# Altium PCB Slave_2_button.PcbDoc
Units mil, origin at the board's own origin, x right, y up, seen from the top; angles counter-clockwise.
Board outline 2250 x 2915 mil, 2 copper layers (Top Layer, Bottom Layer); 28 components, 19 nets, 108 pads, 6 vias.
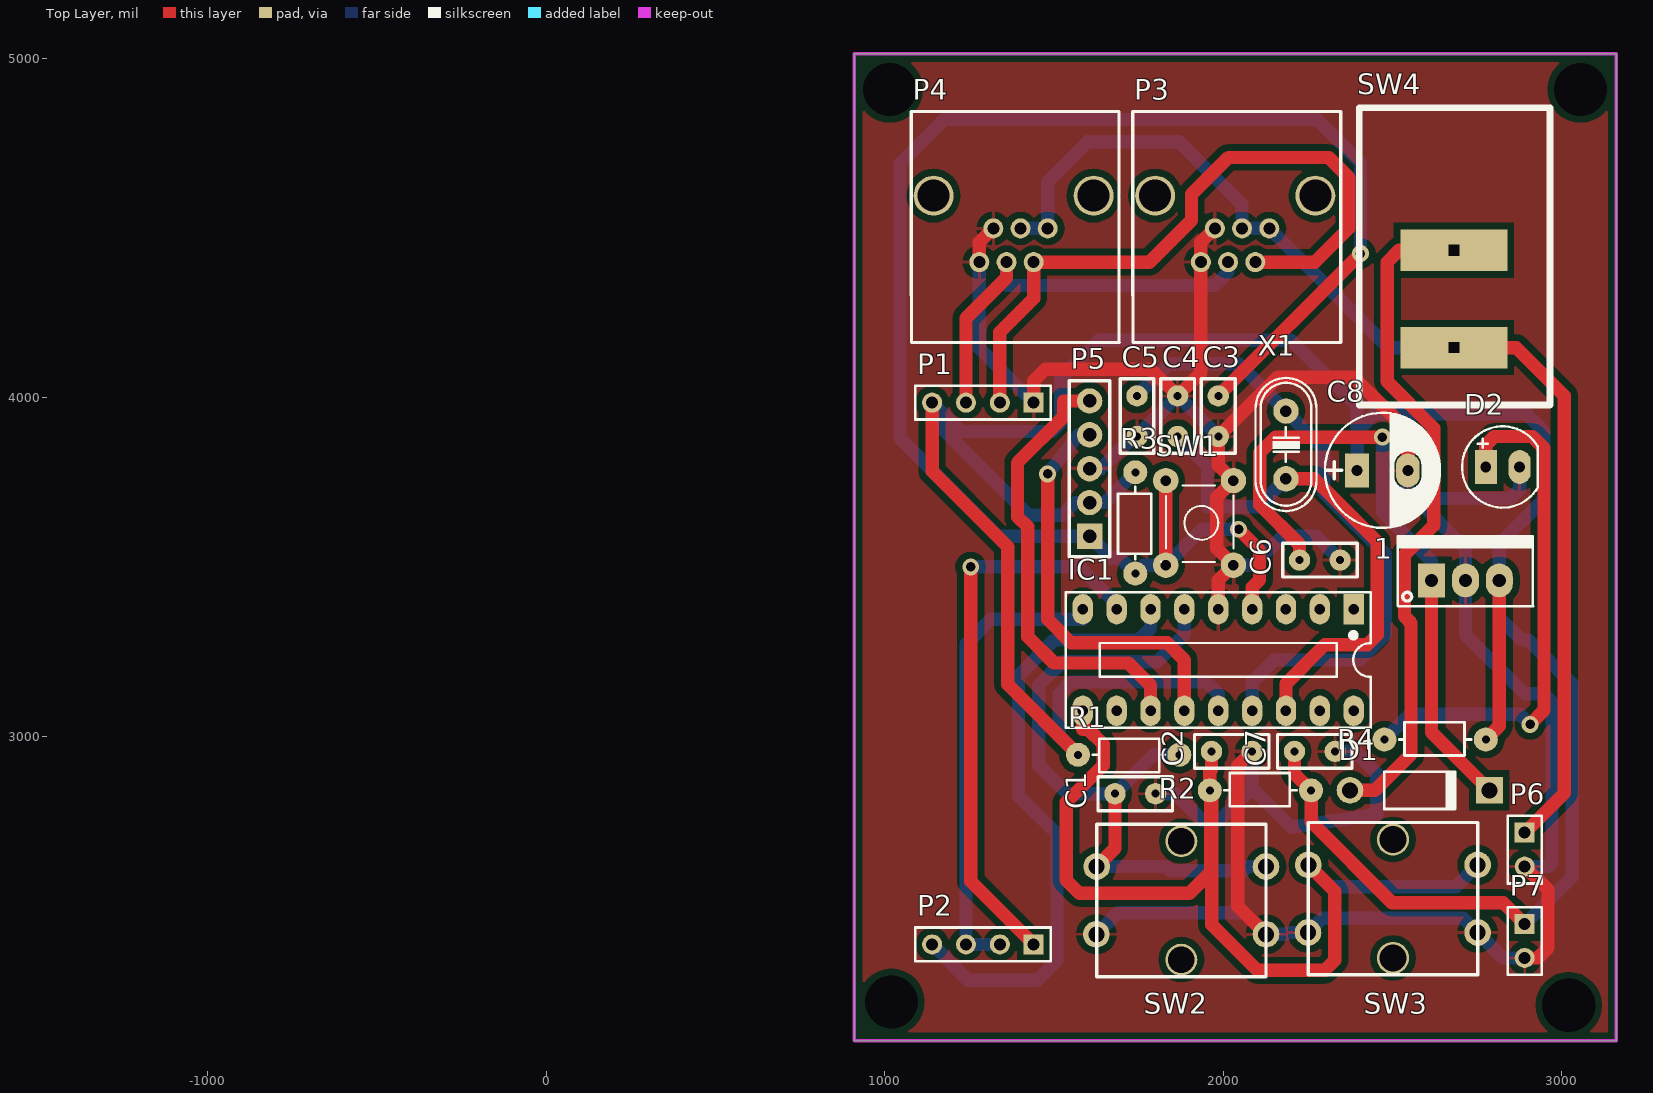
[diagram p0: Top Layer view]
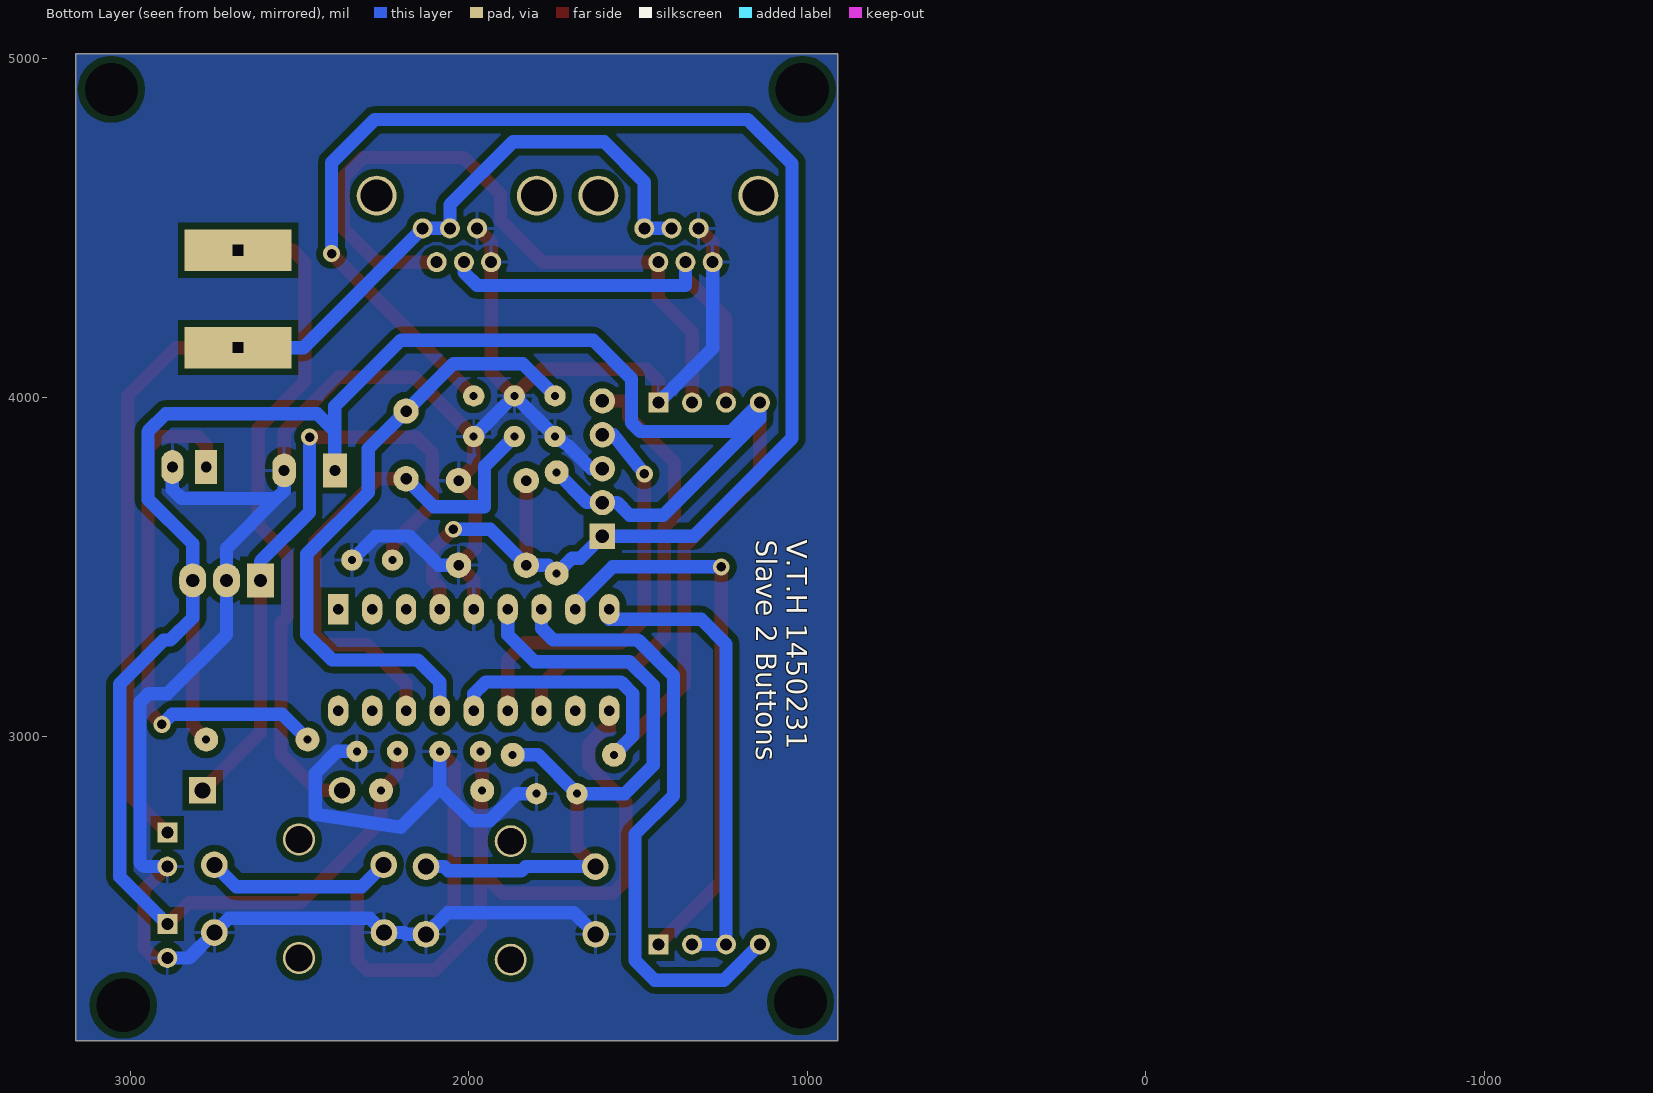
[diagram p1: Bottom Layer view, seen from below]
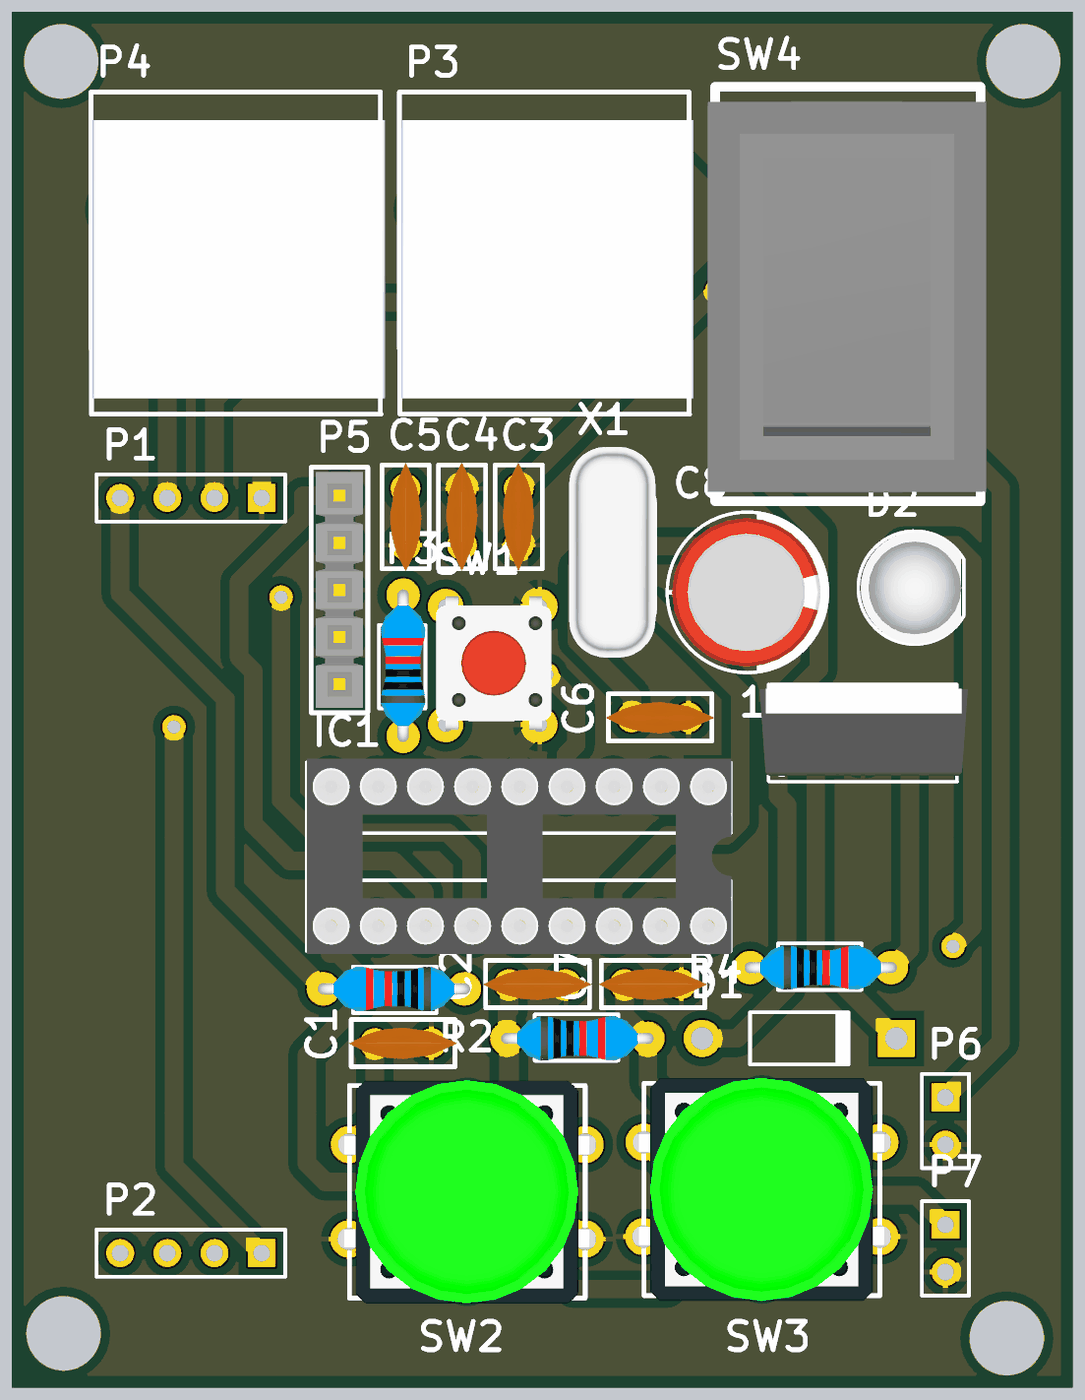
[diagram p2: 3D render of the assembled board from above, using the file's embedded part models]

## Layer stack, top to bottom
Top Solder: solder mask 0.4, Solder Resist, Dk 3.5
Top Layer: signal copper 1.4
Dielectric 1: dielectric 12.6, FR-4, Dk 4.8
Bottom Layer: signal copper 1.4
Bottom Solder: solder mask 0.4, Solder Resist, Dk 3.5

## Board outline
910,2100 3160,2100 3160,5015 910,5015

## Design rules (kind name [scope] priority, off if disabled: settings)
Clearance [All] p1: gap=19.68 ignorepadtopadclearanceinfootprint=FALSE
PolygonConnect [All] p1: connectstyle=Relief reliefconductorwidth=10 reliefentries=4 polygonreliefangle="90 Angle" airgapwidth=19.68
RoutingVias [All] p1: holewidth=28 width=50 viastyle="Through Hole" minholewidth=28 minwidth=50 maxholewidth=28 maxwidth=50
SolderMaskExpansion [All] p1: expansion=4
Width [All] p1: maxlimit=78.74 minlimit=19.68 preferedwidth=39.37
30 further rules are at their usual default settings.

## Components (designator, comment, footprint, x,y, rotation, side; value= is the part's Value field where it differs from the comment)
1 "L78M05CP" QTO-220 2615,3460 r0 top
C1 "Capacitor Ceramic" "Cap Non-Pol 3mm" 1740,2830 r180 top value=100n
C2 "Capacitor Ceramic" "Cap Non-Pol 3mm" 2025,2955 r180 top value=100n
C3 "Capacitor Ceramic" "Cap Non-Pol 3mm" 1985,3945 r90 top value=100n
C4 "Cap Non-pol" "Cap Non-Pol 3mm" 1865,3945 r90 top value=22p
C5 "Cap Non-pol" "Cap Non-Pol 3mm" 1745,3945 r270 top value=22p
C6 "Cap Non-pol" "Cap Non-Pol 3mm" 2285,3520 r180 top value=100n
C7 "Cap Non-pol" "Cap Non-Pol 3mm" 2270,2955 r180 top value=100n
C8 "100uF/16V" CP1.5/3.4 2395,3785 r0 top value=100uF/35V/50V
D1 "Diode 1N4007" DO-41 2580,2840 r0 top
D2 "LED" "LED-5mm RED" 2775,3795 r0 top
IC1 "PIC16F628A" DIP18/W0.3 2385,3375 r180 top
P1 "Header 4" HDR1X4 1440,3985 r180 top
P2 "Header 4" HDR1X4 1440,2385 r180 top
P3 "Header 8" RJ11 2094.29,4400 r180 top
P4 "Header 8" RJ11 1440,4400 r180 top
P5 "Header 5" "Header 5" 1605,3590 r90 top
P6 "Header 2" HDR1X2 2890,2715 r270 top
P7 "Header 2" HDR1X2 2890,2445 r270 top
R1 "RES_SMD_0805" "RESISTOR 1/4W" 1870,2945 r180 top value=10k
R2 "RES_SMD_0805" "RESISTOR 1/4W" 1960,2840 r0 top value=10k
R3 "RES_SMD_0805" "RESISTOR 1/4W" 1740,3480 r90 top value=10k
R4 "RES_SMD_0805" "RESISTOR 1/4W" 2475.79,2990 r0 top value=1k
SW1 "SW7" SW4 2030,3755 r270 top value="Button chip 4 pin"
SW2 "SW-4P-B" SW-4P-B 1875,2515 r180 top
SW3 "SW-4P-B" SW-4P-B 2500,2520 r180 top
SW4 "SW_BapBenh" SW_Bapbenh 2685,4175 r0 top
X1 "20Mhz" XT2 2185,3860 r270 top value=4Mhz

## Footprints (in the part's own frame and the unit in brackets; to place one, negate y for a bottom-side part, rotate by r counter-clockwise, add the part's x,y. Pads: shape width x height; smd on the part's side, far side on the other; paste and mask are expansions set on the pad)
"Cap Non-Pol 3mm" [mm] "Capacitor, Radial; Body 5.6 x 2.5 mm (L x W typ); Pin Spacing 3 mm (typ); Solder Pad 35mil"
  round 1.6 hole 0.6: 1(-1.524,0) 2(1.524,0)
  silkscreen extent -2.79,-1.27 2.79,1.27, body extent -2.92,-0.83 2.92,0.86, height 6.22
CP1.5/3.4 [mil] "Tu hoa 220->470uF,16V, 470uF/16V,25V"
  rect 70x100 hole 32: 1(0,0)
  oval 70x100 hole 32: 2(150,0)
  silkscreen extent -95,-170 245,170, body extent -85,-157 230,157, height 446
DIP18/W0.3 [mil] "18 PIN, W 300mil, Pitch 100mil"
  rect 60x90 hole 31: 1(0,0)
  oval 60x90 hole 31: 2(100,0) 3(200,0) 4(300,0) 5(400,0) 6(500,0) 7(600,0) 8(700,0) 9(800,0) 10(800,300) 11(700,300) 12(600,300) 13(500,300) 14(400,300) 15(300,300) 16(200,300) 17(100,300) 18(0,300)
  silkscreen extent -50,-50 850,350, body extent -51,-57 849,356, height 119
DO-41 [mm] "Diode, Axial; Body 5.2 x 2.7 mm (LxDia. max), Lead Dia. 0.86 mm (max)"
  round 2 hole 1.2: 1(-5.23,0)
  rect 2x2 hole 1.2: 2(5.23,0)
  silkscreen extent -2.65,-1.4 2.75,1.4
HDR1X2 [mm] "Connector; Header; 2 Position"
  rect 1.5x1.5 hole 0.9: 1(0,0)
  round 1.5 hole 0.9: 2(2.54,0)
  silkscreen extent -1.27,-1.27 3.81,1.27
HDR1X4 [mm] "Connector; Header; 4 Position"
  rect 1.5x1.5 hole 0.9: 1(0,0)
  round 1.5 hole 0.9: 2(2.54,0) 3(5.08,0) 4(7.62,0)
  silkscreen extent -1.27,-1.27 8.89,1.27
"Header 5" [mil] "Connector; Header; 5 Position; Solder Pad 35mil"
  rect 75x75 hole 40: 1(0,0)
  round 75 hole 40: 2(100,0) 3(200,0) 4(300,0) 5(400,0)
  silkscreen extent -60,-60 460,60, body extent -50,-50 450,50, height 83
"LED-5mm RED" [mil] "LED-5mm RED"
  rect 65x100 hole 32: 1(0,0)
  oval 65x100 hole 32: 2(100,0)
  silkscreen extent -70,-120 154,120, body extent -65,-119 149,118, height 339
QTO-220 [mil] "TO-220 - 1-2-3"
  rect 80x100 hole 39: 1(0,0)
  oval 80x100 hole 39: 2(100,0) 3(200,0)
  silkscreen extent -100,-76 300,130, body extent -119,-64 322,121, height 755
"RESISTOR 1/4W" [mm] "P=0.25W, PITCH = 7.6 mm"
  round 1.8 hole 0.6: 1(0,0) 2(7.6,0)
  silkscreen extent 1.1,-1.2 6.5,1.3, body extent -0.31,-1.2 7.91,1.2, height 2.7
RJ11 [mm] "DIP 20, 20 PIN, W 300mil, Pin to pin 100mil"
  round 1.5 hole 0.9: 1(0,0) 2(2.04,0) 3(4.08,0) 4(-1.05,-2.53) 5(0.99,-2.53) 6(3.03,-2.53)
  round 3 hole 2.4: 7(-4.5,-4.98) 8(7.51,-4.98)
  silkscreen extent -6.43,-11.3 9.2,6.03, body extent -6.71,-9.8 9.11,5.19, height 12.87
SW4 [mil] "SW button 4pin, 250 x250 mil"
  round 75 hole 31: 1(0,0) 2(250,-200) 3(250,0) 4(0,-200)
  silkscreen extent 15,-215 240,0, body extent -36,-220 276,24, height 276
SW-4P-B [mm] "Nut bam lon"
  round 2 hole 1.2: 1(-6.375,2.54) 2(-6.375,-2.54) 3(6.325,-2.54) 4(6.35,2.54)
  round 2.4 hole 2: ""(-0.025,4.445) ""(-0.025,-4.445)
  silkscreen extent -6.38,-5.72 6.32,5.72, body extent -6.94,-6 6.94,6, height 9.5
SW_Bapbenh [mm] "Typical LED; GREEN; RED; 2 Leads; Solder Pad 35mil"
  rect 8x3.1 hole 0.8 square: 1(-0.1,-0.7) 2(-0.1,6.6)
  silkscreen extent -7.2,-5 7.1,17.3, body extent -7.6,-4.55 7.4,16.55, height 16.72
XT2 [mil] "Footpin for Crystal 2 pin"
  round 75 hole 34: 1(-100,0) 2(100,0)
  silkscreen extent -198,-90 195,90, body extent -233,-93 213,90, height 138

## Part data
1: "Positive Voltage Regulator", ComponentLink1Description="Manufacturer Link", ComponentLink1URL=http://www.st.com/, ComponentLink2Description=Datasheet, ComponentLink2URL=http://www.st.com/stonline/products/literature/ds/2146/l78m05c.pdf, DatasheetVersion=Apr-1994, LatestRevisionDate=17-Jul-2002, LatestRevisionNote="Re-released for DXP Platform.", Note="Tab is connected to pin 3 (GND).", PackageDescription="TO, Thru-Hole, Vertical, Heatsink Mounted; 3 In-Line Leads; Pitch 2.54 mm; Pin sequence 1, 3, 2", PackageReference=ISOWATT220AB, PackageVersion=Jul-1998, Published=24-Aug-2001, Publisher="Altium Limited"
C1 C2 C3: library part CapSMD, "Capacitor", LatestRevisionDate=17-Jul-2002, LatestRevisionNote="Re-released for DXP Platform.", PackageReference=RAD-0.3, Published=8-Jun-2000, Publisher="Altium Limited"
C4 C5 C6 C7: "Non-polarized Capacitor", LatestRevisionDate=17-Jul-2002, LatestRevisionNote="Re-released for DXP Platform.", PackageReference=RAD-0.3, Published=8-Jun-2000, Publisher="Altium Limited"
C8: library part CP3, "Cap 100uF/35V - 470uF/16V", Description 1="1000uF/6,3V - 470uF/16V - 330uF - 25V", Description 2="220uF/35V - 100uF/50V - 63V - 4,7uF/200V", Description 3="22uF => 33uF100V - 3,3uF => 4,7uF/250V", Description 4="2,2uF =>3,3uF/350 - 2,2uF/400V - 1uF/450V"
D1: "1 Amp General Purpose Rectifier", Code_JEDEC=DO-204-AL, ComponentLink1Description="Manufacturer Link", ComponentLink1URL=http://www.fairchildsemi.com/, ComponentLink2Description=Datasheet, ComponentLink2URL=http://www.fairchildsemi.com/ds/1N%2F1N4001.pdf, DatasheetVersion=1998, LatestRevisionDate=17-Jul-2002, LatestRevisionNote="Re-released for DXP Platform.", PackageDescription="Diode, Axial; Body 5.2 x 2.7 mm (LxDia. max), Lead Dia. 0.86 mm (max)", PackageReference=DO-41, PackageVersion=Aug-1999, Published=8-Jun-2000, Publisher="Altium Limited"
D2: "Typical LED", LatestRevisionDate=08-Jul-2005, LatestRevisionNote="Mech Layer 1 removed.", PackageReference=LED-1, Published=8-Jun-2000, Publisher="Altium Limited"
P1 P2: "Header, 4-Pin", LatestRevisionDate=17-Jul-2002, LatestRevisionNote="Re-released for DXP Platform.", Publisher="Altium Limited"
P3 P4: "Header, 8-Pin", LatestRevisionDate=17-Jul-2002, LatestRevisionNote="Re-released for DXP Platform.", Publisher="Altium Limited"
P5: "Header, 5-Pin", LatestRevisionDate=17-Jul-2002, LatestRevisionNote="Re-released for DXP Platform.", Publisher="Altium Limited"
P6 P7: "Header, 2-Pin", LatestRevisionDate=17-Jul-2002, LatestRevisionNote="Re-released for DXP Platform.", Publisher="Altium Limited"
R1 R2 R3 R4: "RES_0805", LatestRevisionDate=17-Jul-2002, LatestRevisionNote="Re-released for DXP Platform.", PackageReference=AXIAL-0.4, Published=8-Jun-2000, Publisher="Altium Limited"
SW1: library part SW4, "Switch button 4 pin"
SW2 SW3: library part SW-4PIN-BIG, "Switch Big 4 Pin", LatestRevisionDate=17-Jul-2002, LatestRevisionNote="Re-released for DXP Platform.", PackageReference=SPST-2, Published=24-Mar-1999, Publisher="Altium Limited"
X1: library part XT2, "Crystal For all Crystal 2pin."

## Free pads (board coordinates)
  round 60 hole 157.48: 2(-1310,4750) 2(-1300,4745) 6(1015,4910) 6(1020,2215) 6(3020,2205) 6(3055,4910)

## Via types
v1: diameter 50, hole 28, Top Layer to Bottom Layer, 6 vias

## Nets (pads, with @x,y where several pads share a name; then routed paths per layer and width w, separated by ;. In a path a pad name is that pad's centre, name@x,y a point inside that pad or via, vN(x,y) a via of type N, cw(c..) or ccw(c..) an arc to the next point about the centre after c; other vN are vias at no path point)
12V: P3.4 P3.5 P4.4 P4.5 P6.1 SW4.1 | length 3482.4
  Top Layer w39.37: SW4.1 2865,4147.44 3007,4005.44 3007,2832 P6.1
  Bottom Layer w39.37: P4.5 P4.4 1481.34,4636.68 1600,4755.34 1868.98,4755.34 2055.31,4569 P3.5 P3.4 2487.8,4147.44 SW4.1
A: P1.2 P3.1 P4.1 | length 2050.5
  Top Layer w39.37: P1.2 1340,4193 1440,4293 P4.1 1782,4400 1906,4524 1906,4600 2015,4709 2311,4709 2370,4650 2370,4500 2270,4400 P3.1
B: P1.3 P3.2 P4.2 | length 1234
  Top Layer w39.37: P1.3 1240,4234 1359.69,4353.69 P4.2
  Bottom Layer w39.37: P4.2 1359.69,4331 1975,4331 2013.98,4369.98 P3.2
BUTTON1: C1.2 IC1.6 R1.1 SW2.2 SW2.3 | length 2047.9
  Top Layer w39.37: SW2.3 1680,2669 C1.2
  Bottom Layer w39.37: SW2.3 1832,2615 1844,2603 2060,2603 2072,2615 SW2.2 ; R1.1 1795,2945 C1.2 1539.01,2830 1455,2914.01 1455,3150 1525,3220 1805,3220 1885,3300 IC1.6
BUTTON2: C2.2 IC1.10 R2.1 SW3.2 SW3.3 | length 3109.3
  Top Layer w39.37: IC1.10 1585,3019.8 1601.77,3019.8 1645.59,2975.99 1645.59,2914.01 1536,2804.42 1536,2575 1575,2536 1900,2536 1963,2599 R2.1@1963,2840 ; C2.2 1965,2900 1960,2895 R2.1 R2.1@1963,2840 ; SW3.3 2329,2542 2329,2338 2300,2309 2100,2309 1966,2443 1966,2840 R2.1@1963,2840
  Bottom Layer w39.37: SW3.3 2316,2555 2686,2555 SW3.2
BUTTON3: IC1.11
GND: 1.2 C1.1 C2.1 C3.1 C4.2 C5.2 C6.1 C7.1 C8.2 D2.2 IC1.5 P1.1 P3.3 P3.6 P4.3 P4.6 P5.3 P6.2 P7.2 SW1.1 SW1.3 SW2.1 SW2.4 SW3.1 SW3.4 | length 9294.4
  Top Layer w39.37: P4.3 1279.37,4458.27 P4.6 ; P1.1 1440,4050 1474,4084 1786,4084 C4.2 1933.66,4073.66 P3.3 1933.66,4458.27 P3.6 ; IC1.5 1985,3460 SW1.3 1980.63,3554.37 1980.63,3705.63 SW1.1 1985,3800 C3.1 2160,4060 2385,4060 2545,3900 C8.2 ; C2.1 2043,2913 2043,2498 SW2.1 ; P7.2 2929,2345 2959,2375 2959,2546 P6.2
  Bottom Layer w39.37: P4.3 1279.37,4145.63 P1.1 ; P5.3 1638,3790 1707,3859 C5.2 C4.2 C3.1 ; SW2.4 1689,2479 2062,2479 SW2.1 2185,2415 2190,2420 SW3.4 2292,2462 2709,2462 SW3.1 2826,2345 P7.2 ; C1.1 1858.49,2830 1938.49,2750 1988.49,2750 2085,2846.51 ; SW1.3 2088.74,3505 2174.74,3591 2274,3591 C6.1 ; C2.1 2085,2846.51 ; C7.1 2388.74,2955 2452.84,2890.91 2452.84,2769.33 2200,2731 2085,2846 2085,2846.51 ; C8.2 2545,3725 2567.94,3702.06 ; D2.2 2875,3729 2848.06,3702.06 2567.94,3702.06 ; P6.2 2959,2615 2970.64,2626.64 2970.64,3100 2945.64,3125 2890,3125 2715,3300 1.2 2715,3555 2567.94,3702.06
MCLR: C3.2 IC1.4 P5.1 R3.1 SW1.2 SW1.4 | length 4881.2
  Top Layer w39.37: SW1.2 SW1.4 ; C3.2 v1(2405,4425) ; v1(2045,3611) 2107,3549 2107,3462 2085,3440 IC1.4
  Bottom Layer w39.37: v1(2045,3611) 1936,3611 SW1.2 1765,3505 R3.1 1695,3525 1670,3525 P5.1 1335,3590 1045,3880 1045,4691 1175,4821 2278,4821 2405,4694 v1(2405,4425)
Net1_1: 1.1 C6.2 D1.2 | length 1920.4
  Top Layer w39.37: C6.2 2225,3566 2108,3683 2108,3837 2154,3883 v1(2470,3883) ; 1.1 2615,3010.91 D1.2
  Bottom Layer w39.37: v1(2470,3883) 2470,3661 2615,3516 1.1
NetD1_1: D1.1 SW4.2 | length 1990.5
  Top Layer w39.37: D1.1 2448,2840 2554.24,2946.24 2554.24,3334.31 2535,3353.56 2535,3535.41 2621.87,3622.28 2621.87,3909.55 2484,4047.43 2484,4400 2518.84,4434.84 SW4.2
NetD2_1: D2.1 R4.1 | length 1567.5
  Top Layer w39.37: D2.1 2775,3860 2800,3885 2912,3885 2947,3850 2947,3076 v1(2906,3035)
  Bottom Layer w39.37: R4.1 2550.79,3065 2876,3065 v1(2906,3035)
PGC: IC1.12 P5.5 | length 1339.4
  Top Layer w39.37: P5.5 1528,3990 1528,3943 1392,3807 1392,3648.22 1422.11,3618.11 1422.11,3293.89 1500,3216 1719,3216 1785,3150 IC1.12
PGD: IC1.13 P5.4 | length 1212.7
  Top Layer w39.37: v1(1481.17,3774.88) 1481.17,3344.83 1550,3276 1834,3276 1885,3225 IC1.13
  Bottom Layer w39.37: v1(1481.17,3774.88) 1573.16,3890 P5.4
RXD: IC1.7 P2.4 | length 1829.6
  Bottom Layer w39.37: P2.4 1246,2279 1450,2279 1509,2338 1509,2710.09 1395,2824.09 1395,3179 1500,3284 1750,3284 1785,3319 IC1.7
SEC: IC1.9 P2.2 P2.3 | length 1392.1
  Bottom Layer w39.37: P2.2 P2.3 1240,3271.76 1313.18,3344.94 1585,3344.94 IC1.9
TXD: IC1.8 P2.1 | length 1683.6
  Top Layer w39.37: v1(1254,3500) 1254,2571 P2.1
  Bottom Layer w39.37: v1(1254,3500) 1575,3500 1685,3390 IC1.8
VCC: 1.3 C7.2 C8.1 IC1.14 P1.4 P5.2 P7.1 R1.2 R2.2 R3.2 R4.2 | length 8270.7
  Top Layer w39.37: P1.4 1140,3782.06 1363.06,3559 1363.06,3152.73 R1.2 ; C7.2 2210,2889.21 R2.2 2259.21,2746.79 2498,2508 2827,2508 P7.1 ; R4.2 2815,3030 1.3
  Bottom Layer w39.37: R1.2 1515,3000.79 1515,3125 1550,3160 1950,3160 1985,3125 IC1.14 ; R3.2 1650.79,3690 P5.2 1561.71,3690 1524.13,3652.43 1425,3652.43 1140,3937.43 P1.4 1225,3900 1494,3900 1519,3925 1519,4056 1632,4169 2200,4169 2395,3974 2395,3900 ; C8.1 2395,3900 ; P7.1 3030,2585 3030,3154 2900,3284 2881,3284 2815,3350 1.3 2815,3568 2947,3700 2947,3900 2895,3952 2447,3952 2395,3900
XT1: C4.1 IC1.16 X1.2 | length 1540.5
  Top Layer w39.37: IC1.16 2185,3155 2300,3270 2425,3270 2455,3300 2455,3574 2269,3760 X1.2
  Bottom Layer w39.37: C4.1 1953,3797 1953,3678 2103,3678 X1.2
XT2: C5.1 IC1.15 X1.1 | length 1854.7
  Bottom Layer w39.37: C5.1 1840,4100 2045,4100 X1.1 2296.57,3848.43 2296.57,3719.43 2478,3538 2478,3300 2403,3225 2150,3225 2085,3160 IC1.15
pads on no net: IC1.1 IC1.2 IC1.3 IC1.17 IC1.18 P3.7 P3.8 P4.7 P4.8 SW2. SW3.

## Polygon pours and split planes (outlines as drawn)
GND on Top Layer "top" (solid, pour order 2): 910,5015 3160,5015 3160,2100 910,2100
GND on Bottom Layer "bot" (solid, pour order 0): 910,5015 3160,5015 3160,2095 3155,2100 910,2100

## Keep-outs
Top Layer:
  the board outline again, w10

## Silkscreen, mask and mechanical layers (free items; w line width, h text height)
Bottom Overlay:
  text "V.T.H 1450231 / Slave 2 Buttons" at 1150,3580 h60 r90